# Altium PCB FET_Gate_Drive_Breakout.PcbDoc
Units mil, origin at the board's own origin, x right, y up, seen from the top; angles counter-clockwise.
Board outline 1100 x 1300 mil, 2 copper layers (Top Layer, Bottom Layer); 14 components, 25 nets, 62 pads, 3 vias.
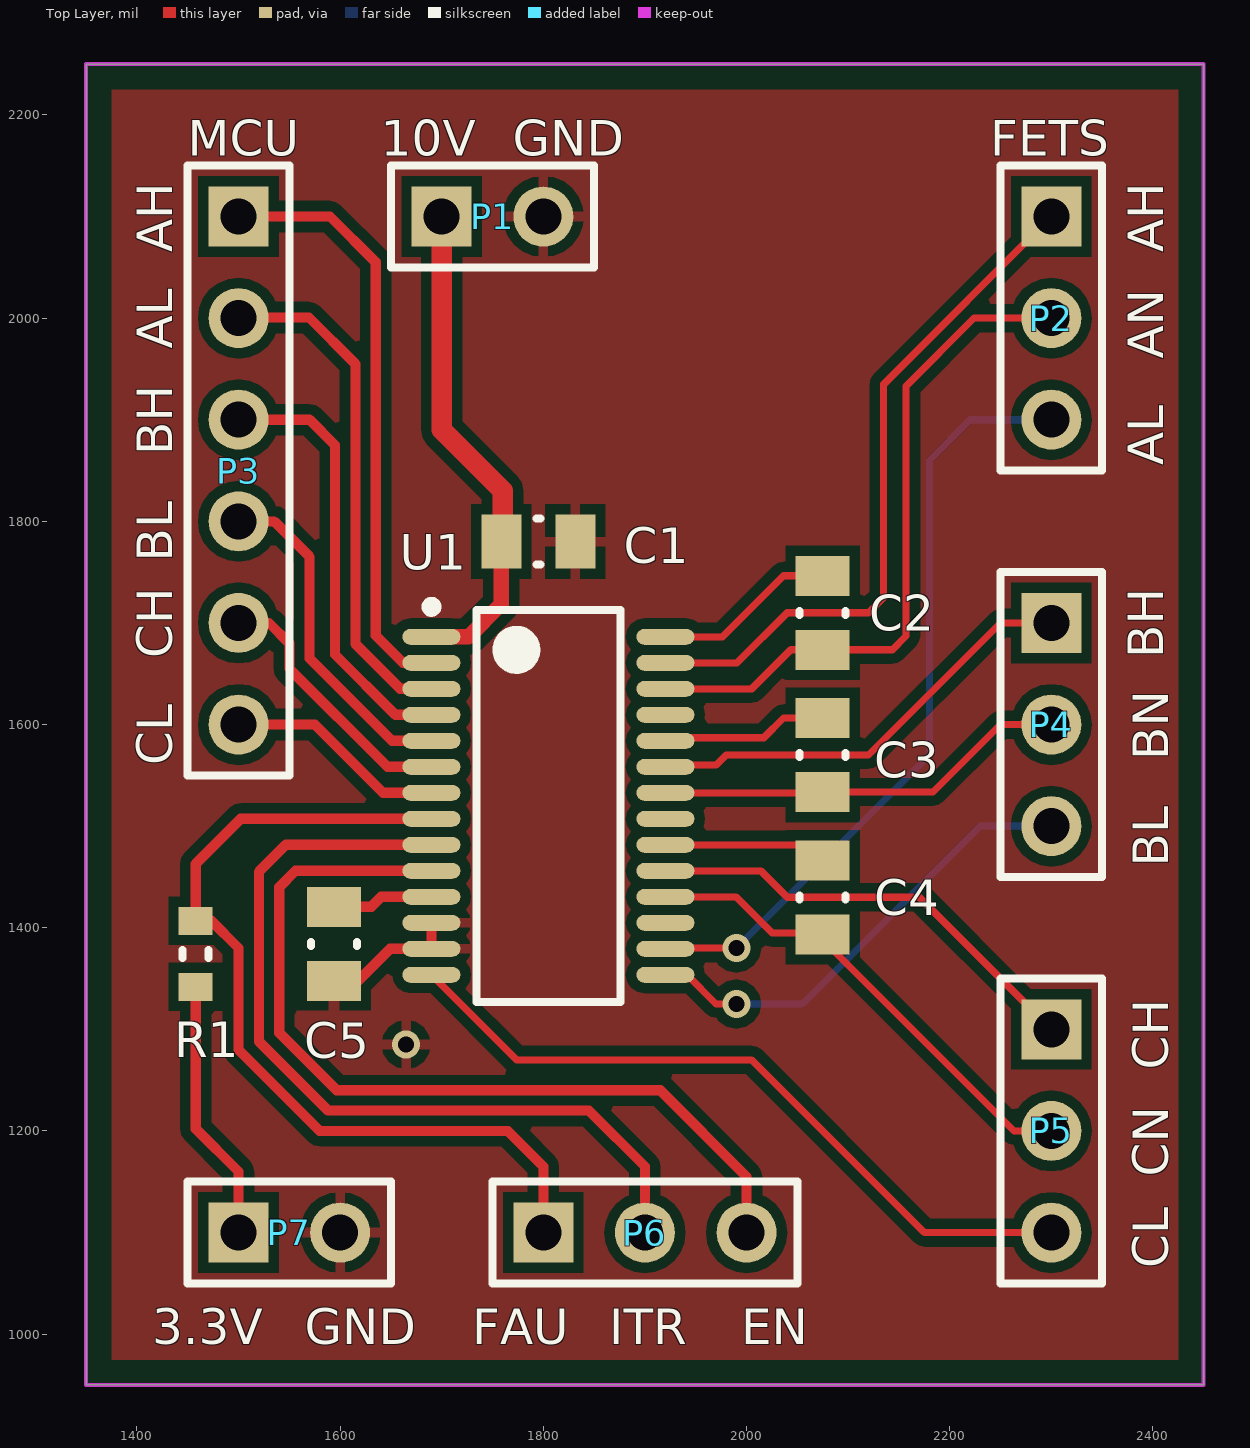
[diagram p0: Top Layer view]
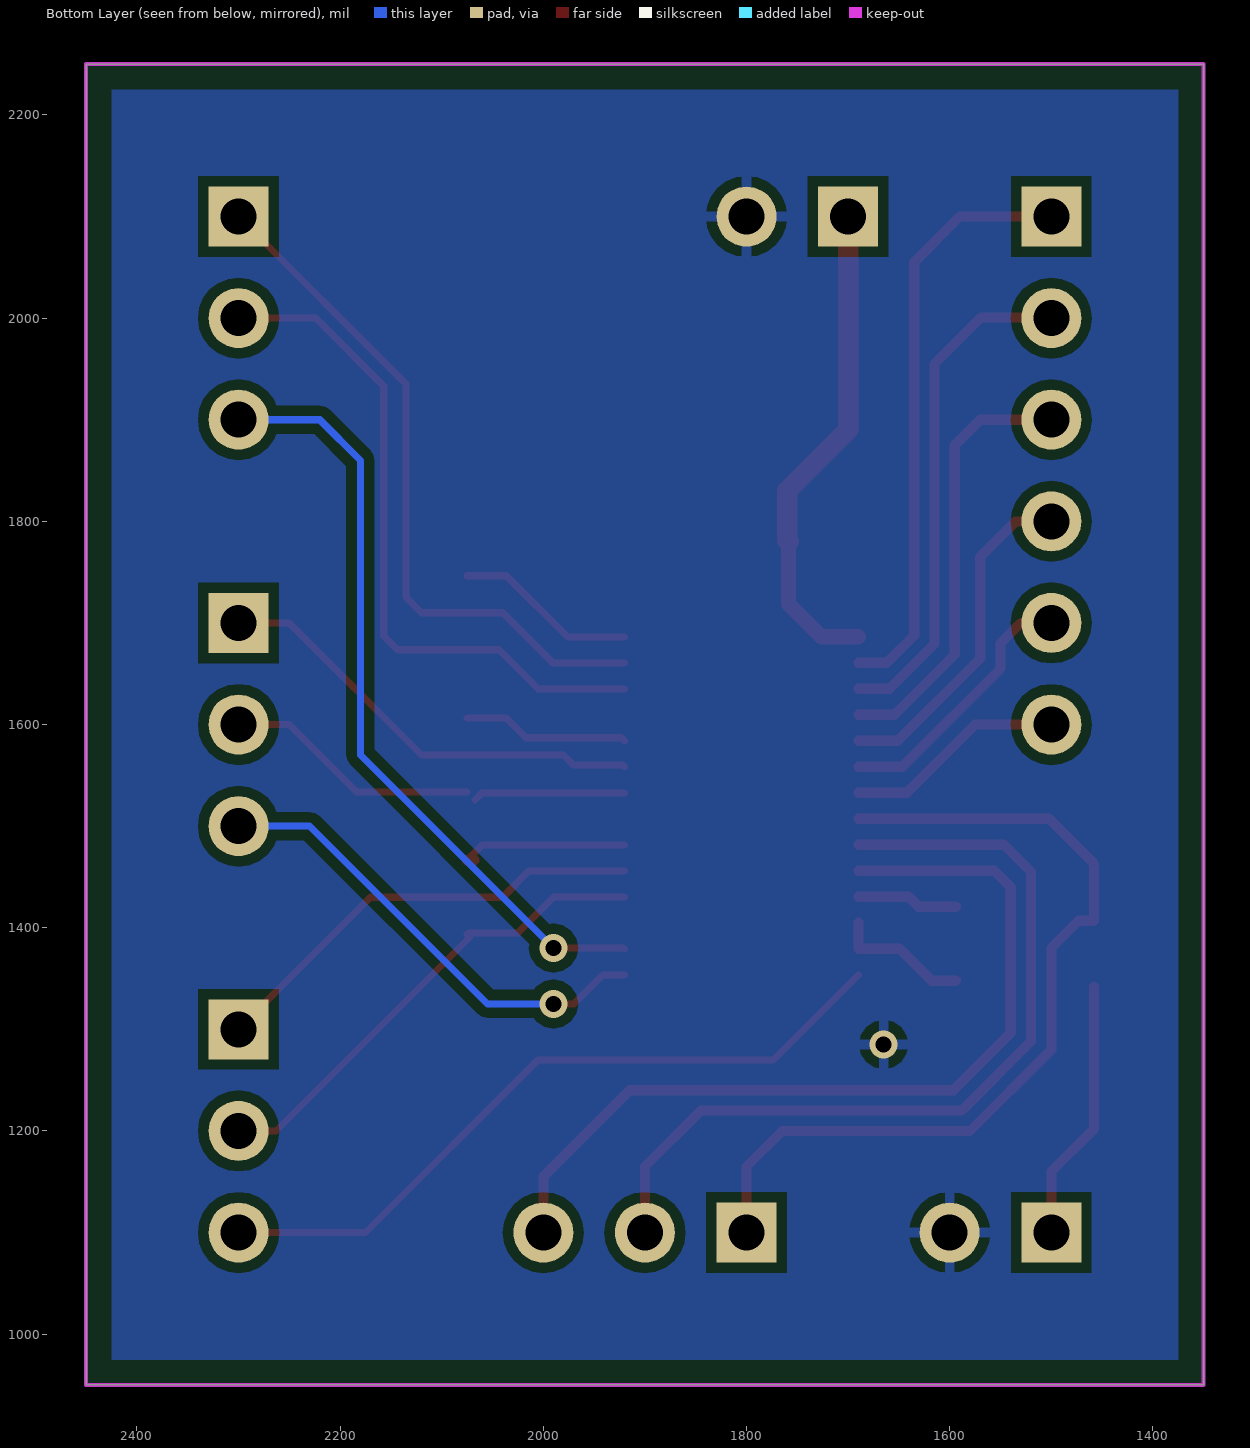
[diagram p1: Bottom Layer view, seen from below]
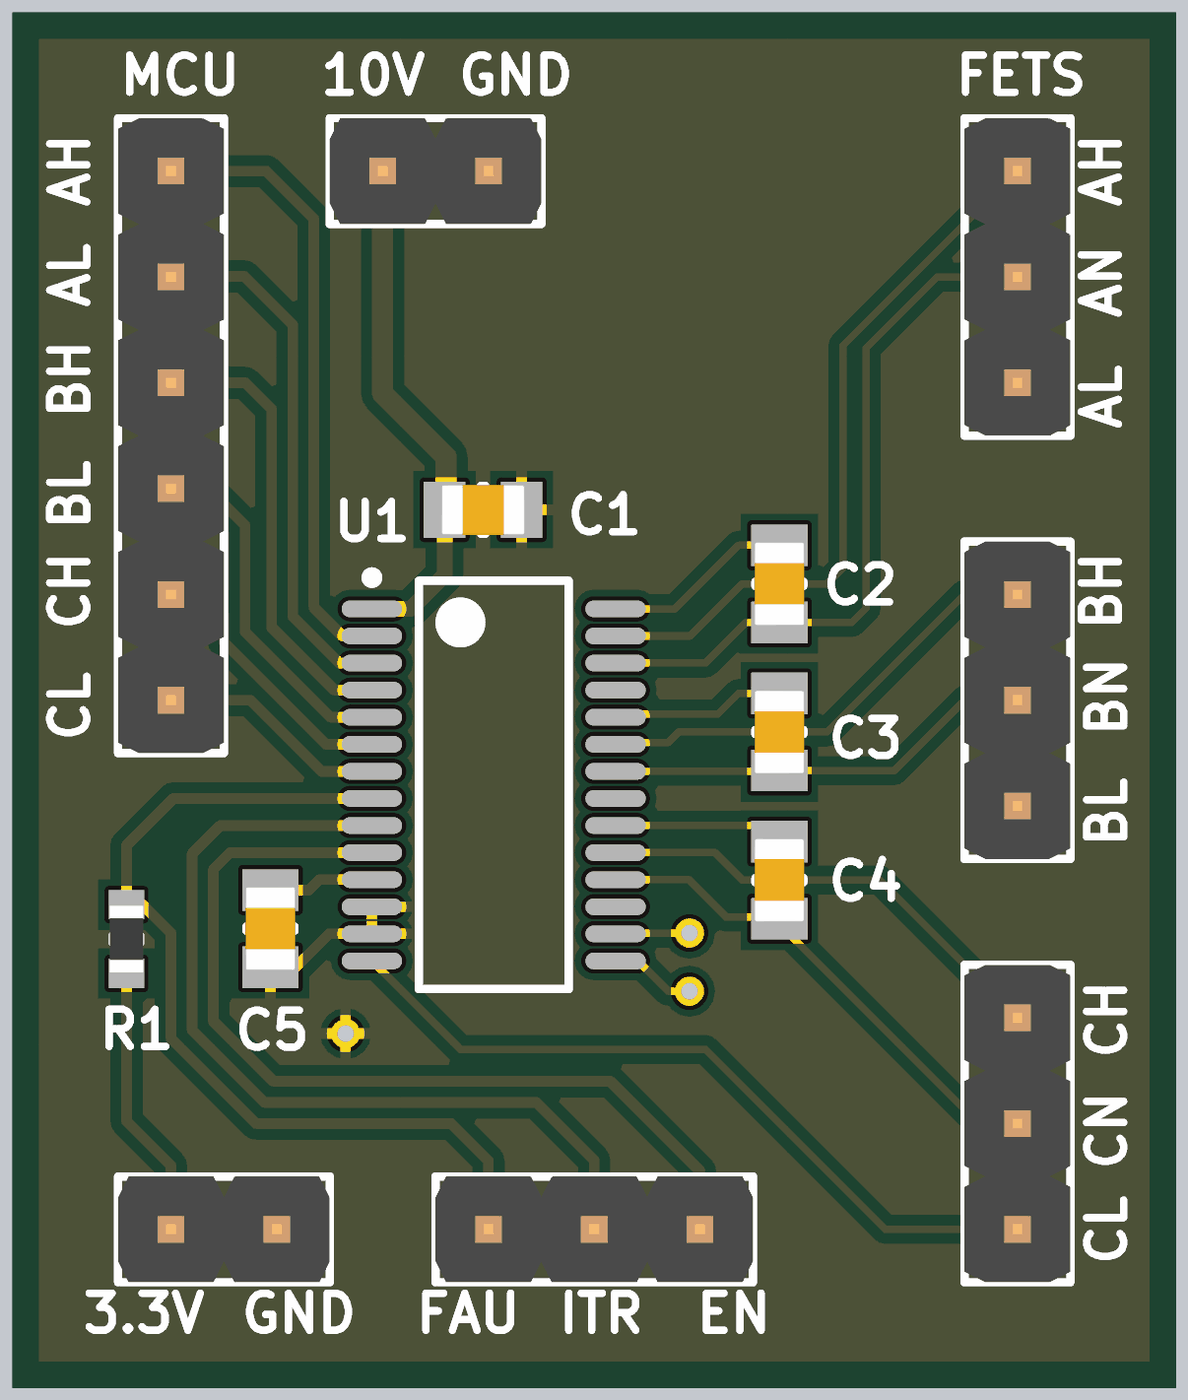
[diagram p2: 3D render of the assembled board from above, using the file's embedded part models]

## Layer stack, top to bottom
Top Solder: solder mask 0.4, Solder Resist, Dk 3.5
Top Layer: signal copper 1.4
Dielectric 1: dielectric 12.6, FR-4, Dk 4.8
Bottom Layer: signal copper 1.4
Bottom Solder: solder mask 0.4, Solder Resist, Dk 3.5

## Board outline
1350,950 2450,950 2450,2250 1350,2250

## Design rules (kind name [scope] priority, off if disabled: settings)
Clearance [All] p1: gap=10 ignorepadtopadclearanceinfootprint=TRUE except(0: Arc-Hole Track-Hole SMDPad-Hole THPad-Hole Via-Hole Fill-Hole Poly-Hole Region-Hole Text-Hole)
PolygonConnect [All] p1: connectstyle=Relief reliefconductorwidth=10 reliefentries=4 polygonreliefangle="90 Angle" airgapwidth=10
RoutingVias [All] p1: holewidth=28 width=50 viastyle="Through Hole" minholewidth=14 minwidth=25 maxholewidth=28 maxwidth=50
SolderMaskExpansion [All] p1: expansion=4 istentingtop=FALSE
Width [All] p1: maxlimit=50 minlimit=7 preferedwidth=10 minimp=50.000000 maximp=50.000000 favimp=50.000000
30 further rules are at their usual default settings.

## Components (designator, comment, footprint, x,y, rotation, side; value= is the part's Value field where it differs from the comment)
C1 "Capacitor - Nonpolarized" "0805 - Capacitor" 1795,1780 r0 top value="100 nF"
C2 "Capacitor - Nonpolarized" "0805 - Capacitor" 2075,1710 r270 top value="220 nF"
C3 "Capacitor - Nonpolarized" "0805 - Capacitor" 2075,1570 r270 top value="220 nF"
C4 "Capacitor - Nonpolarized" "0805 - Capacitor" 2075,1430 r270 top value="220 nF"
C5 "Capacitor - Nonpolarized" "0805 - Capacitor" 1594.01,1384.17 r90 top value="1 nF"
P1 "1x2 Header" HDR1X2 1700,2100 r0 top
P2 "1x3 Header" HDR1X3 2300,2100 r270 top
P3 "1x6 Header" HDR1X6 1500,2100 r270 top
P4 "1x3 Header" HDR1X3 2300,1700 r270 top
P5 "1x3 Header" HDR1X3 2300,1300 r270 top
P6 "1x3 Header" HDR1X3 1800,1100 r0 top
P7 "1x2 Header" HDR1X2 1500,1100 r0 top
R1 "Resistor" "0603 - Resistor" 1457.88,1374.33 r270 top value="10 k"
U1 "6EDL04N02PRXUMA1" TSOP65P640X120-28N 1805,1520 r0 top

## Footprints (in the part's own frame and the unit in brackets; to place one, negate y for a bottom-side part, rotate by r counter-clockwise, add the part's x,y. Pads: shape width x height; smd on the part's side, far side on the other; paste and mask are expansions set on the pad)
"0603 - Resistor" [mm] "0201 Chip Resistor - IPC Medium Density"
  rect 0.7x0.85 smd: 1(-0.825,0) 2(0.825,0)
  silkscreen extent -0.1,-0.33 0.1,0.33, body extent -0.8,-0.4 0.8,0.4, height 0.45
"0805 - Capacitor" [mm] "0805 Chip Capacitor - IPC Medium Density"
  rect 1x1.35 smd: 1(-0.925,0) 2(0.925,0)
  silkscreen extent -0.05,-0.58 0.05,0.58, body extent -1,-0.6 1,0.6, height 1.2
HDR1X2 [mm] "Connector; Header; 2 Position"
  rect 1.5x1.5 hole 0.9: 1(0,0)
  round 1.5 hole 0.9: 2(2.54,0)
  silkscreen extent -1.27,-1.27 3.81,1.27, body extent -1.27,-1.27 3.81,1.27, height 8.54
HDR1X3 [mm] "Connector; Header; 3 Position"
  rect 1.5x1.5 hole 0.9: 1(0,0)
  round 1.5 hole 0.9: 2(2.54,0) 3(5.08,0)
  silkscreen extent -1.27,-1.27 6.35,1.27, body extent -1.27,-1.27 6.35,1.27, height 8.54
HDR1X6 [mm] "Connector; Header; 6 Position"
  rect 1.5x1.5 hole 0.9: 1(0,0)
  round 1.5 hole 0.9: 2(2.54,0) 3(5.08,0) 4(7.62,0) 5(10.16,0) 6(12.7,0)
  silkscreen extent -1.27,-1.27 13.97,1.27, body extent -1.27,-1.27 13.97,1.27, height 8.54
TSOP65P640X120-28N [mm] "TSOP, 28-Leads, Body 9.70x4.40mm, Pitch 0.65mm, IPC Medium Density"
  oval 1.45x0.4 smd: 1(-2.925,4.225) 2(-2.925,3.575) 3(-2.925,2.925) 4(-2.925,2.275) 5(-2.925,1.625) 6(-2.925,0.975) 7(-2.925,0.325) 8(-2.925,-0.325) 9(-2.925,-0.975) 10(-2.925,-1.625) 11(-2.925,-2.275) 12(-2.925,-2.925) 13(-2.925,-3.575) 14(-2.925,-4.225) 15(2.925,-4.225) 16(2.925,-3.575) 17(2.925,-2.925) 18(2.925,-2.275) 19(2.925,-1.625) 20(2.925,-0.975) 21(2.925,-0.325) 22(2.925,0.325) 23(2.925,0.975) 24(2.925,1.625) 25(2.925,2.275) 26(2.925,2.925) 27(2.925,3.575) 28(2.925,4.225)
  silkscreen extent -3.05,-4.9 1.8,5.1, body extent -2.2,-4.9 2.2,4.9, height 1.2

## Part data
C1: "Nonpolarized Capacitor", Manufacturer=Yageo, Manufacturer Part Number=CC0805KRX7R9BB104, Supplier Part Number=311-1140-1-ND
C2 C3 C4: "Nonpolarized Capacitor", Manufacturer=Yageo, Manufacturer Part Number=CC0805KKX7R0BB224, Rating=100V, Supplier Part Number=311-1874-1-ND
C5: "Nonpolarized Capacitor", Manufacturer=Yageo, Manufacturer Part Number=CC0805KRX7R9BB102, Supplier Part Number=311-1127-1-ND
P1 P7: "1x2 Pin Header"
P2 P4 P5 P6: "1x3 Pin Header"
P3: "1x6 Pin Header"
R1: Manufacturer=ROHM, Manufacturer Part Number=ESR03EZPJ103, Supplier Part Number=RHM10KDCT-ND
U1: "200V Three Phase Gate Driver", Digikey Part Number=6EDL04N02PRXUMA1CT-ND, Manufacturer=Infineon, Datasheet=https://www.infineon.com/dgdl/6ED2-DB-Rev2_3.pdf?folderId=db3a30431a5c32f2011a77fa27a86cb5&fileId=db3a304336797ff901367c18c18445af, Manufacturer Part Number=6EDL04N02PRXUMA1

## Via types
v1: diameter 27.56, hole 15.75, Top Layer to Bottom Layer, 3 vias

## Nets (pads, with @x,y where several pads share a name; then routed paths per layer and width w, separated by ;. In a path a pad name is that pad's centre, name@x,y a point inside that pad or via, vN(x,y) a via of type N, cw(c..) or ccw(c..) an arc to the next point about the centre after c; other vN are vias at no path point)
+3.3: P7.1 R1.2 | length 259.3
  Top Layer w10: R1.2 1457.88,1202.12 1500,1160 P7.1
+10: C1.1 P1.1 U1.1 | length 489
  Top Layer w15: U1.1 1726.34,1686.34 1758.58,1718.58 C1.1
  Top Layer w20: P1.1 1700,1890 1760,1830 1760,1781.42 C1.1
A_BOOT: C2.2 P2.2 U1.26 | length 675
  Top Layer w7: U1.26 2005.16,1635.16 2043.58,1673.58 C2.2 2143.58,1673.58 2157.02,1687.02 2157.02,1932.98 2224.04,2000 P2.2
A_H: P2.1 U1.27 | length 699.8
  Top Layer w7: U1.27 1990.75,1660.75 2040,1710 2120,1710 2135,1725 2135,1935 P2.1 P2.1@2285,2100
A_L: P2.3 U1.16 | length 765.4
  Top Layer w7: U1.16 1920.91,1380 v1(1990,1380)
  Bottom Layer w7: v1(1990,1380) 2180,1570 2180,1860 2220,1900 P2.3
B_BOOT: C3.2 P4.2 U1.22 | length 402.5
  Top Layer w7: U1.22 2060.2,1532.8 C3.2@2067.2,1525.79 ; C3.2 2183.58,1533.58 2250,1600 P4.2
B_H: P4.1 U1.23 | length 438.5
  Top Layer w7: U1.23 1921.77,1560 1970,1560 1980,1570 2024.04,1570 2120,1570 2250,1700 P4.1
B_L: P4.3 U1.15 | length 464.2
  Top Layer w7: U1.15 1941.34,1353.66 1970,1325 v1(1990,1325)
  Bottom Layer w7: v1(1990,1325) 2055,1325 2230,1500 P4.3
C_BOOT: C4.2 P5.2 U1.18 | length 480.7
  Top Layer w7: U1.18 1989.57,1430.43 2025,1395 2073.58,1395 C4.2 2072.28,1390.87 2263.15,1200 P5.2
C_H: P5.1 U1.19 | length 444.5
  Top Layer w7: U1.19 2013.98,1456.02 2040,1430 2170,1430 P5.1
C_L: P5.3 U1.14 | length 715.2
  Top Layer w7: U1.14 1773.5,1270 2005,1270 2175,1100 P5.3
GND: C1.2 C5.1 P1.2 P7.2 U1.12 U1.13 | length 134.5
  Top Layer w10: C5.1 1617.76,1347.76 1649.25,1379.25 U1.13 U1.12
  other v1: 1665,1285
NetC2_1: C2.1 U1.28 | length 179.7
  Top Layer w7: U1.28 1976.34,1686.34 2036.42,1746.42 C2.1
NetC3_1: C3.1 U1.24 | length 164.1
  Top Layer w7: U1.24 1923.18,1587 1972.96,1587 2017,1587 2036.42,1606.42 C3.1
NetC4_1: C4.1 U1.20 | length 168.2
  Top Layer w7: U1.20 2059.8,1481.61 C4.1
  Top Layer w10: C4.1@2067.93,1466.42 C4.1
NetC5_2: C5.2 U1.11 | length 99.9
  Top Layer w10: C5.2 1630.59,1420.59 1640.43,1430.43 U1.11
NetP3_1: P3.1 U1.2 | length 587
  Top Layer w10: P3.1 1590,2100 1635,2055 1635,1687.69 1661.94,1660.75 U1.2
NetP3_2: P3.2 U1.3 | length 495.7
  Top Layer w10: P3.2@1507.03,2000.65 1569.35,2000.65 1615,1955 1615,1679.4 1659.24,1635.16 U1.3
NetP3_3: P3.3 U1.4 | length 430.9
  Top Layer w10: P3.3 1570,1900 1595,1875 1595,1668.93 1654.37,1609.57 U1.4
NetP3_4: P3.4 U1.5 | length 337.9
  Top Layer w10: P3.4 1535,1800 1570,1765 1570,1665 1651.02,1583.98 U1.5
NetP3_5: P3.5 U1.6 | length 263.1
  Top Layer w10: P3.5 1530,1700 1550,1680 1550,1655 1646.61,1558.39 U1.6
NetP3_6: P3.6 U1.7 | length 217.7
  Top Layer w10: P3.6 1575,1600 1642.2,1532.8 U1.7
NetP6_1: P6.1 R1.1 U1.8 | length 872.2
  Top Layer w10: U1.8 1502.2,1507.2 1457.88,1462.88 R1.1 1473.19,1406.81 1500,1380 1500,1280 1580,1200 1765,1200 1800,1165 P6.1
NetP6_2: P6.2 U1.9 | length 843.6
  Top Layer w10: U1.9 1546.61,1481.61 1520,1455 1520,1288.28 1588.28,1220 1845,1220 1900,1165 P6.2
NetP6_3: P6.3 U1.10 | length 873.6
  Top Layer w10: U1.10 1556.02,1456.02 1540,1440 1540,1296.57 1596.57,1240 1915,1240 2000,1155 P6.3
pads on no net: U1.17 U1.21 U1.25

## Polygon pours and split planes (outlines as drawn)
GND on Top Layer "NONET_L-01_P-001" (solid, pour order 0): 1375,2225 2425,2225 2425,975 1375,975
GND on Bottom Layer "NONET_L-01_P-001" (solid, pour order 1): 1375,2225 2425,2225 2425,975 1375,975

## Keep-outs
Keep-Out Layer:
  the board outline again, w3.94

## Silkscreen, mask and mechanical layers (free items; w line width, h text height)
Top Overlay:
  text "MCU" at 1450,2160 h35
  text "10V" at 1640,2160 h35
  text "GND" at 1770,2160 h35
  text "FETS" at 2240,2160 h35
  text "AH" at 1435,2065 h35 r90
  text "AH" at 2410,2065 h35 r90
  text "AL" at 1435,1970 h35 r90
  text "AN" at 2410,1960 h35 r90
  text "BH" at 1435,1865 h35 r90
  text "AL" at 2410,1855 h35 r90
  text "BL" at 1435,1760 h35 r90
  text "CH" at 1435,1665 h35 r90
  text "BH" at 2410,1665 h35 r90
  text "BN" at 2415,1565 h35 r90
  text "CL" at 1435,1560 h35 r90
  text "BL" at 2415,1460 h35 r90
  text "CH" at 2415,1260 h35 r90
  text "CN" at 2415,1155 h35 r90
  text "CL" at 2415,1065 h35 r90
  text "3.3V" at 1415,990 h35
  text "GND" at 1565,990 h35
  text "FAU" at 1730,990 h35
  text "ITR" at 1865,990 h35
  text "EN" at 1995,990 h35